# Altium PCB activity_tracker_panel_support.PcbDoc
Units mm, origin at the board's own origin, x right, y up, seen from the top; angles counter-clockwise.
Board outline 148.5 x 148.5 mm, 4 copper layers (Top Layer, MidLayer1, Mid-Layer 2, Bottom Layer), stack 0.79 mm thick; 2 components, 29 nets, 2 pads, 0 vias.
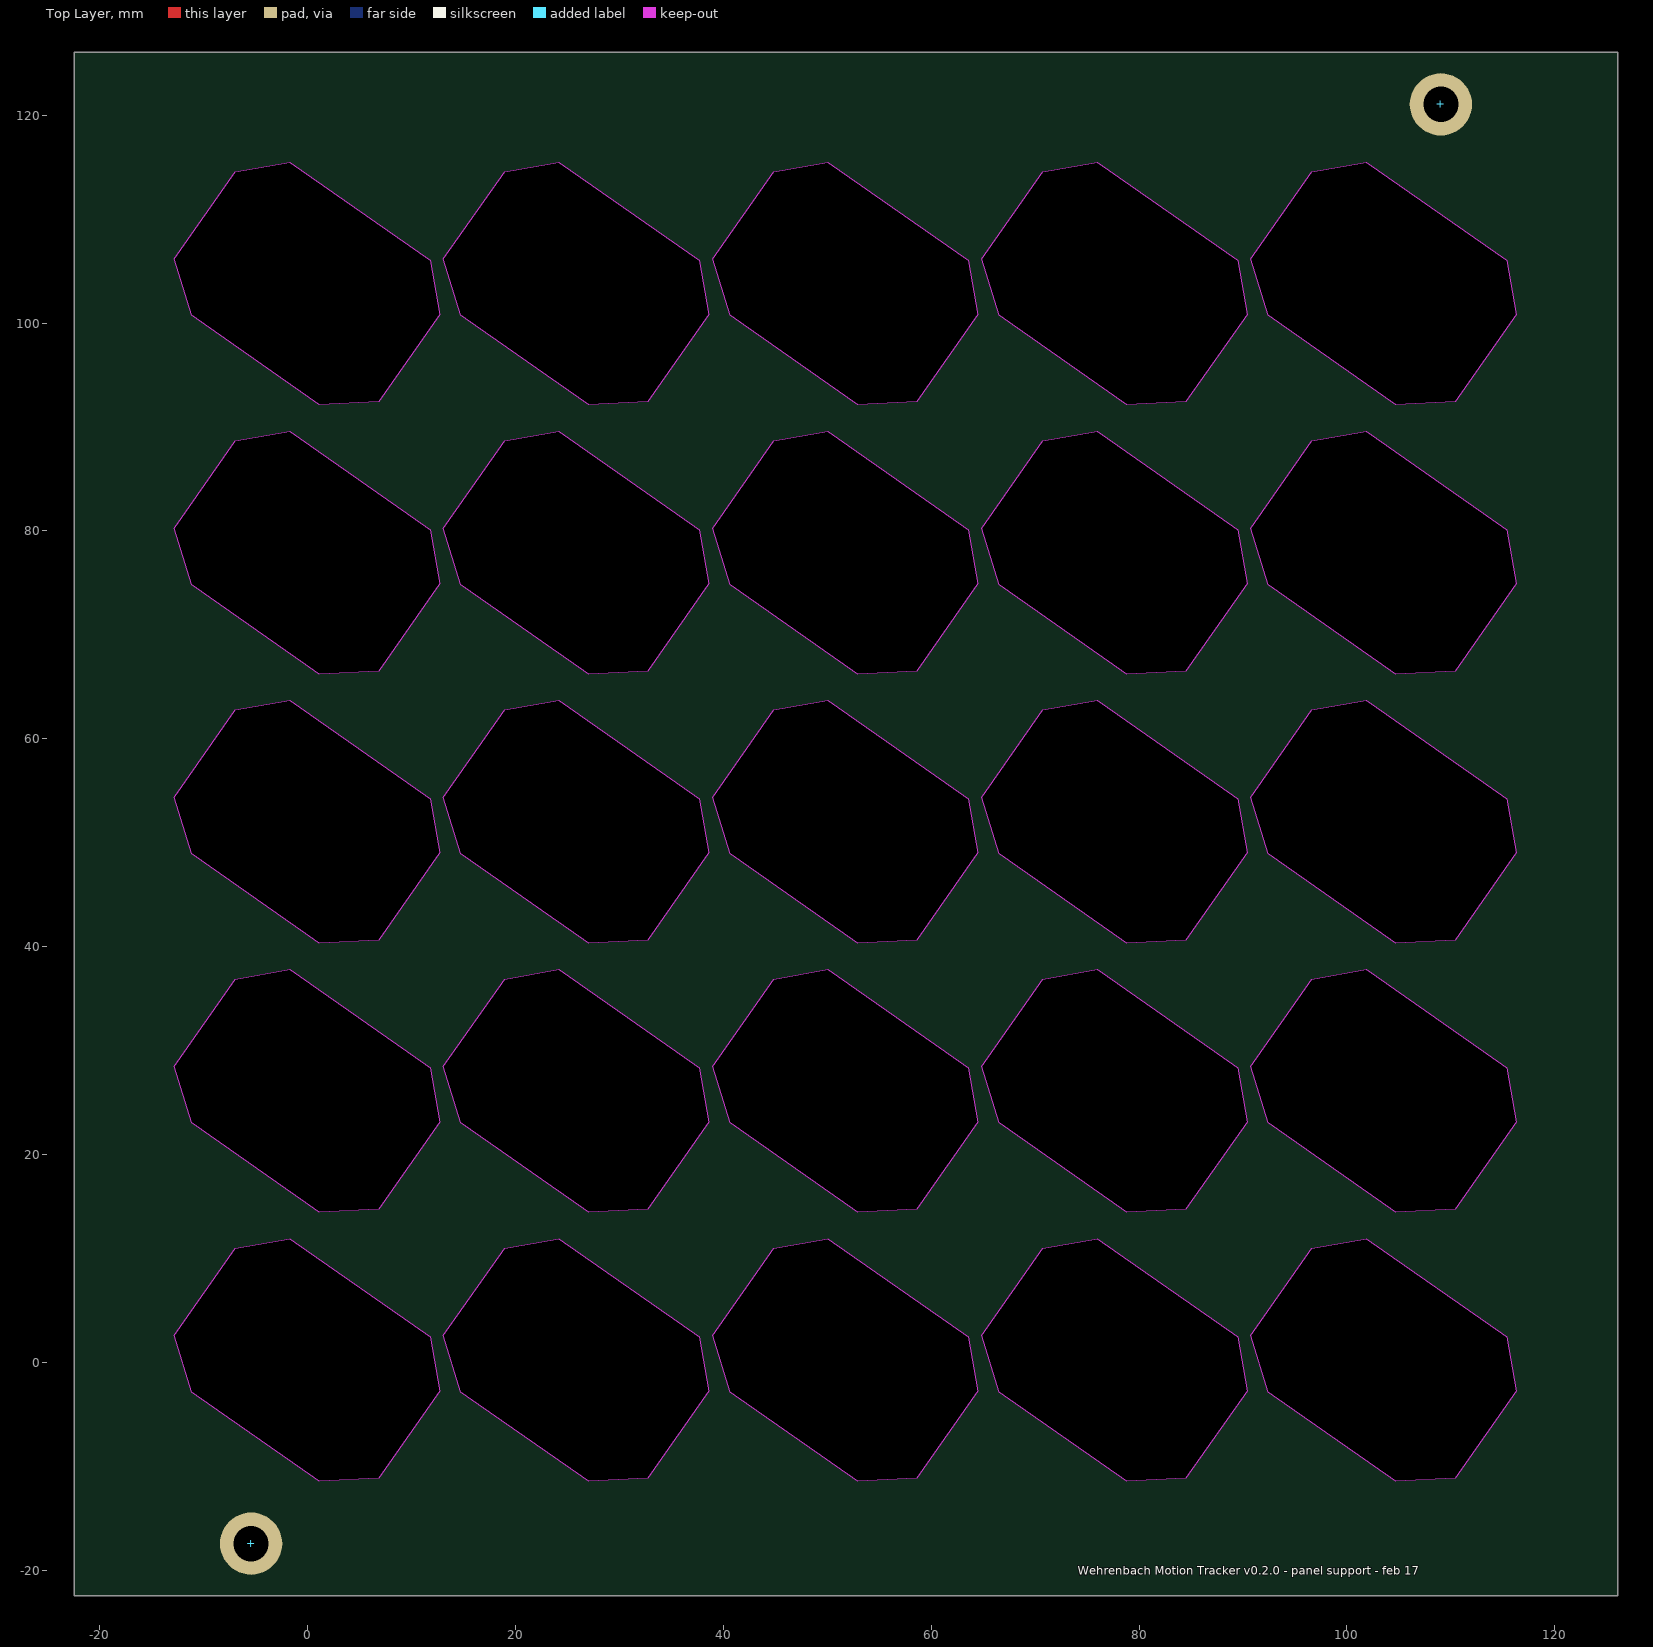
[diagram p0: Top Layer view]
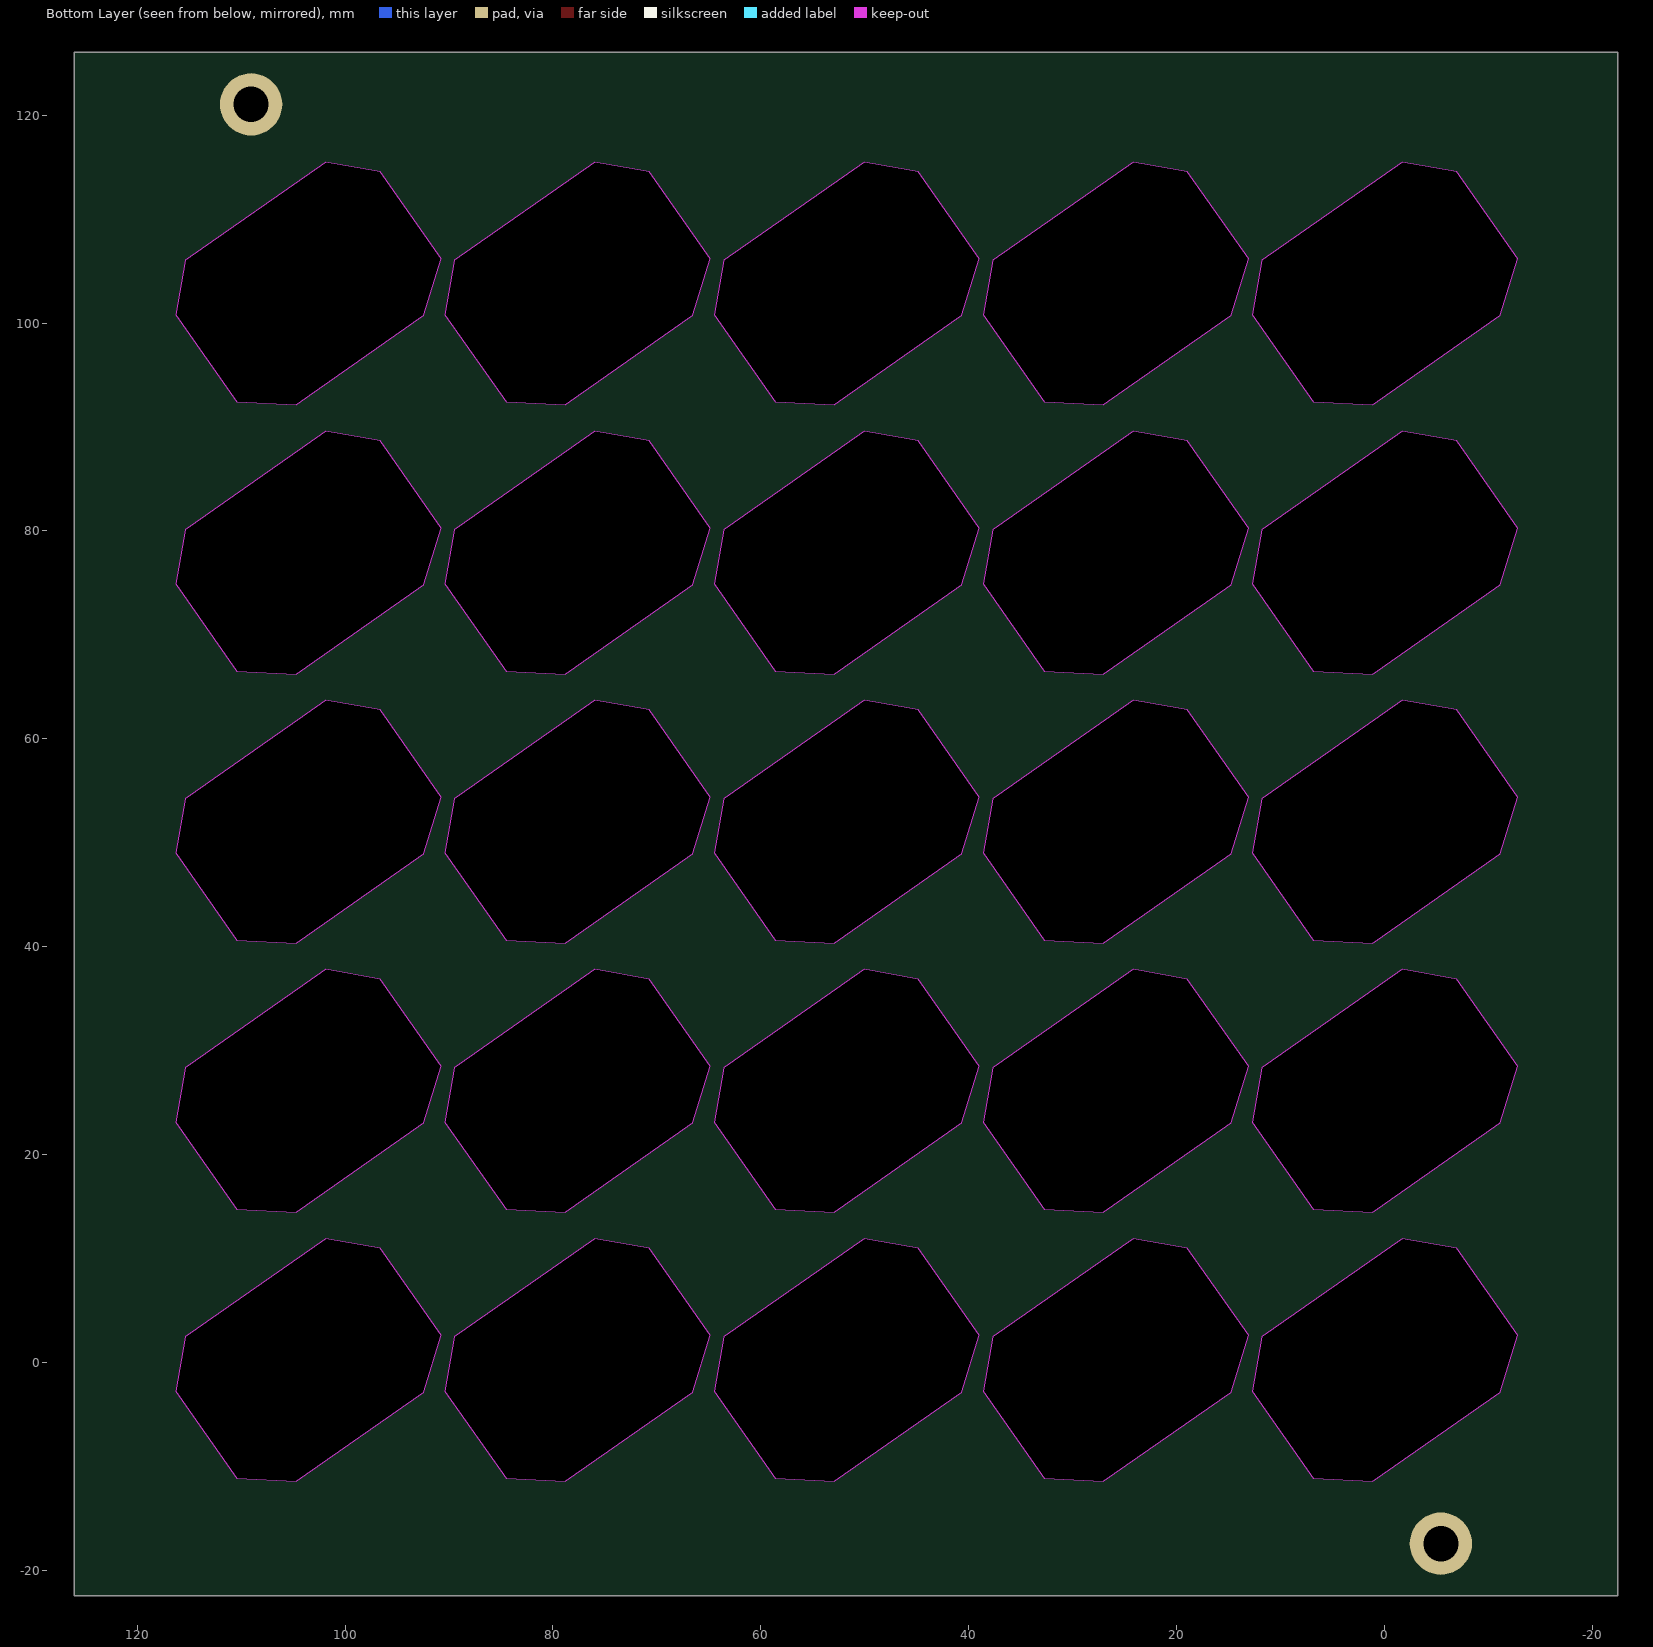
[diagram p1: Bottom Layer view, seen from below]

## Layer stack, top to bottom
Top Solder: solder mask 0.0102, Solder Resist, Dk 3.5
Top Layer: signal copper 0.0356
Dielectric1: prepreg 0.1, FR-4, Dk 4.8
MidLayer1: signal copper 0.0356
Dielectric2: prepreg 0.228, FR-4, Dk 4.8
Mid-Layer 2: signal copper 0.0356
Dielectric3: core 0.32, FR-4, Dk 4.8
Bottom Layer: signal copper 0.0356
Bottom Solder: solder mask 0.0102, Solder Resist, Dk 3.5

## Board outline
-22.45,-22.45 -22.45,126.05 126.05,126.05 126.05,-22.45
cut-out: -6.962,10.979 -1.739,11.9 11.777,2.436 12.698,-2.787 6.819,-11.183 1.125,-11.469 -11.162,-2.866 -12.841,2.582
cut-out: 18.938,10.979 24.161,11.9 37.677,2.436 38.598,-2.787 32.719,-11.183 27.025,-11.469 14.738,-2.866 13.059,2.582
cut-out: 44.838,10.979 50.061,11.9 63.577,2.436 64.498,-2.787 58.619,-11.183 52.925,-11.469 40.638,-2.866 38.959,2.582
cut-out: 70.738,10.979 75.961,11.9 89.477,2.436 90.398,-2.787 84.519,-11.183 78.825,-11.469 66.538,-2.866 64.859,2.582
cut-out: 96.638,10.979 101.861,11.9 115.377,2.436 116.298,-2.787 110.419,-11.183 104.725,-11.469 92.438,-2.866 90.759,2.582
cut-out: 96.638,36.879 101.861,37.8 115.377,28.336 116.298,23.113 110.419,14.717 104.725,14.431 92.438,23.034 90.759,28.482
cut-out: 70.738,36.879 75.961,37.8 89.477,28.336 90.398,23.113 84.519,14.717 78.825,14.431 66.538,23.034 64.859,28.482
cut-out: 44.838,36.879 50.061,37.8 63.577,28.336 64.498,23.113 58.619,14.717 52.925,14.431 40.638,23.034 38.959,28.482
cut-out: 18.938,36.879 24.161,37.8 37.677,28.336 38.598,23.113 32.719,14.717 27.025,14.431 14.738,23.034 13.059,28.482
cut-out: -6.962,36.879 -1.739,37.8 11.777,28.336 12.698,23.113 6.819,14.717 1.125,14.431 -11.162,23.034 -12.841,28.482
cut-out: 96.638,62.779 101.861,63.7 115.377,54.236 116.298,49.013 110.419,40.617 104.725,40.331 92.438,48.934 90.759,54.382
cut-out: 70.738,62.779 75.961,63.7 89.477,54.236 90.398,49.013 84.519,40.617 78.825,40.331 66.538,48.934 64.859,54.382
cut-out: 44.838,62.779 50.061,63.7 63.577,54.236 64.498,49.013 58.619,40.617 52.925,40.331 40.638,48.934 38.959,54.382
cut-out: 18.938,62.779 24.161,63.7 37.677,54.236 38.598,49.013 32.719,40.617 27.025,40.331 14.738,48.934 13.059,54.382
cut-out: -6.962,62.779 -1.739,63.7 11.777,54.236 12.698,49.013 6.819,40.617 1.125,40.331 -11.162,48.934 -12.841,54.382
cut-out: 96.638,88.679 101.861,89.6 115.377,80.136 116.298,74.913 110.419,66.517 104.725,66.231 92.438,74.834 90.759,80.282
cut-out: 70.738,88.679 75.961,89.6 89.477,80.136 90.398,74.913 84.519,66.517 78.825,66.231 66.538,74.834 64.859,80.282
cut-out: 44.838,88.679 50.061,89.6 63.577,80.136 64.498,74.913 58.619,66.517 52.925,66.231 40.638,74.834 38.959,80.282
cut-out: 18.938,88.679 24.161,89.6 37.677,80.136 38.598,74.913 32.719,66.517 27.025,66.231 14.738,74.834 13.059,80.282
cut-out: -6.962,88.679 -1.739,89.6 11.777,80.136 12.698,74.913 6.819,66.517 1.125,66.231 -11.162,74.834 -12.841,80.282
cut-out: 96.638,114.579 101.861,115.5 115.377,106.036 116.298,100.813 110.419,92.417 104.725,92.131 92.438,100.734 90.759,106.182
cut-out: 70.738,114.579 75.961,115.5 89.477,106.036 90.398,100.813 84.519,92.417 78.825,92.131 66.538,100.734 64.859,106.182
cut-out: 44.838,114.579 50.061,115.5 63.577,106.036 64.498,100.813 58.619,92.417 52.925,92.131 40.638,100.734 38.959,106.182
cut-out: 18.938,114.579 24.161,115.5 37.677,106.036 38.598,100.813 32.719,92.417 27.025,92.131 14.738,100.734 13.059,106.182
cut-out: -6.962,114.579 -1.739,115.5 11.777,106.036 12.698,100.813 6.819,92.417 1.125,92.131 -11.162,100.734 -12.841,106.182

## Design rules (kind name [scope] priority, off if disabled: settings)
AcuteAngle [All] p1: minimum=4.00000000000000E+0001 checktracksonly=FALSE
Clearance ClearanceLogoStyle1 [All vs InComponentClass('logoStyle1')] p1: gap=0.3 ignorepadtopadclearanceinfootprint=FALSE except(0: Arc-Hole Track-Hole SMDPad-Hole THPad-Hole Via-Hole Fill-Hole Poly-Hole Region-Hole Text-Hole)
Clearance ClearanceKeepout [All vs IsKeepOut] p2: gap=0.001 ignorepadtopadclearanceinfootprint=FALSE except(0: Arc-Hole Track-Hole SMDPad-Hole THPad-Hole Via-Hole Fill-Hole Poly-Hole Region-Hole Text-Hole)
Clearance ClearanceThickWire [IsTrack And AsMM(Width) > 0.2] p3: gap=0.2 ignorepadtopadclearanceinfootprint=FALSE except(0: Arc-Hole Track-Hole SMDPad-Hole THPad-Hole Via-Hole Fill-Hole Poly-Hole Region-Hole Text-Hole)
Clearance ClearancePad [IsPad vs IsPad] p4: gap=0.15 ignorepadtopadclearanceinfootprint=FALSE except(0: Arc-Hole Track-Hole SMDPad-Hole THPad-Hole Via-Hole Fill-Hole Poly-Hole Region-Hole Text-Hole)
Clearance ClearancePolyPad [InPolygon vs IsPad] p5: gap=0.3 ignorepadtopadclearanceinfootprint=FALSE except(0: Arc-Hole Track-Hole SMDPad-Hole THPad-Hole Via-Hole Fill-Hole Poly-Hole Region-Hole Text-Hole)
Clearance ClearancePoly [InPolygon vs InPolygon] p6: gap=0.25 ignorepadtopadclearanceinfootprint=FALSE except(0: Arc-Hole Track-Hole SMDPad-Hole THPad-Hole Via-Hole Fill-Hole Poly-Hole Region-Hole Text-Hole)
Clearance [All] p7: gap=0.15 ignorepadtopadclearanceinfootprint=FALSE except(0: Arc-Hole Track-Hole SMDPad-Hole THPad-Hole Via-Hole Fill-Hole Poly-Hole Region-Hole Text-Hole)
ComponentClearance [All] p1: gap=0.1 collisioncheckmode=3 verticalgap=0.1 showdistances=TRUE
ComponentOrientations [All] p1: allowedrotations=32
Height [All] p1: minheight=0 maxheight=30 prefheight=1
HoleSize [All] p1: absolutevalues=TRUE maxlimit=15 minlimit=0.3 maxpercent=80.000 minpercent=20.000
HoleToHoleClearance [All] p1: gap=0.2 allowstackedmicrovias=TRUE
MinimumAnnularRing [All] p1: minimumring=0.15
MinimumSolderMaskSliver MinimumSolderMaskSliverLogo [All vs ( InComponentClass('ignoreSilkscreen') or InComponentClass('leitwertLogo'))] p1: minsoldermaskwidth=0
MinimumSolderMaskSliver [All] p2: minsoldermaskwidth=0.1
PasteMaskExpansion [All] p1: expansion=-0.075
PermittedLayers [All] p1: toplayerpermitted=TRUE bottomlayerpermitted=FALSE
PlaneClearance [All] p1: clearance=0.5
PlaneConnect [All] p1: planeconnectstyle=Relief reliefexpansion=0.5 reliefentries=4 reliefconductorwidth=0.25 reliefairgap=0.25
PolygonConnect PolygonConnectComponents [All vs InComponentClass('directConnect')] p1: connectstyle=Direct reliefconductorwidth=0.254 reliefentries=4 polygonreliefangle="90 Angle" airgapwidth=0.254
PolygonConnect PolygonConnectVia [IsVia] p2: connectstyle=Direct reliefconductorwidth=0.254 reliefentries=4 polygonreliefangle="90 Angle" airgapwidth=0.254
PolygonConnect PolygonConnectPoly [InPolygonClass('directConnect')] p3: connectstyle=Direct reliefconductorwidth=0.254 reliefentries=4 polygonreliefangle="90 Angle" airgapwidth=0.254
PolygonConnect [All] p4: connectstyle=Relief reliefconductorwidth=0.25 reliefentries=4 polygonreliefangle="90 Angle" airgapwidth=0.254
RoutingCorners [All] p1: cornerstyle=45-Degree minsetback=2.5 maxsetback=2.5
RoutingVias [All] p1: holewidth=0.3 width=0.6 viastyle="Through Hole" minholewidth=0.3 minwidth=0.5 maxholewidth=1.5 maxwidth=2
SilkToSilkClearance [All] p1: silktosilkclearance=0.1
SilkToSolderMaskClearance SilkscreenOverComponentPadsLogo [IsPad vs ( InComponentClass('ignoreSilkscreen') or InComponentClass('logoStyle1'))] p1: minsilkscreentomaskgap=0 clearancetoexposedcopper=TRUE
SilkToSolderMaskClearance SilkscreenOverComponentPads [IsPad vs not InComponentClass('ignoreSilkscreen')] p2: minsilkscreentomaskgap=0.001 clearancetoexposedcopper=TRUE
SolderMaskExpansion SolderMaskExpansionVia [IsVia] p1: expansion=-0.635
SolderMaskExpansion [All] p2: expansion=0.038
Width WidthLogoStyle1 [InComponentClass('logoStyle1')] p1: maxlimit=100 minlimit=0.15 preferedwidth=0.25 checkconnectedcopper=TRUE
Width [All] p2: maxlimit=10 minlimit=0.2 preferedwidth=0.2
19 further rules are at their usual default settings.

## Components (designator, comment, footprint, x,y, rotation, side; value= is the part's Value field where it differs from the comment)
+ "Comment" M3_PLATED_MEDIUM -5.45,-17.45 r270 top
+ "Comment" M3_PLATED_MEDIUM 109.05,121.05 r270 top

## Footprints (in the part's own frame and the unit in brackets; to place one, negate y for a bottom-side part, rotate by r counter-clockwise, add the part's x,y. Pads: shape width x height; smd on the part's side, far side on the other; paste and mask are expansions set on the pad)
M3_PLATED_MEDIUM [mm] "Plated M3 Hole Medium Size"
  round 6 hole 3.4 paste-3: H(0,0)

## Nets (pads, with @x,y where several pads share a name; then routed paths per layer and width w, separated by ;. In a path a pad name is that pad's centre, name@x,y a point inside that pad or via, vN(x,y) a via of type N, cw(c..) or ccw(c..) an arc to the next point about the centre after c; other vN are vias at no path point)
ACC_ADC: 
ACC_C\S\: 
ACC_INT1: 
ACC_INT2: 
ACC_MISO: 
ACC_MOSI: 
ACC_SCK: 
FL_C\S\: 
FL_E\N\: 
FL_F\S\H\D\N\: 
FL_MISO: 
FL_MOSI: 
FL_SCK: 
GND: 
INT_BUT: 
LED1: 
LED2: 
NetC2_2: 
NetC11_1: 
NetLED1_1: 
NetLED2_1: 
RESET: 
SWDCLK: 
SWDIO: 
SWO: 
V_FL+: 
VBAT+: 
XL1: 
XL2: 
pads on no net: +.H

## Silkscreen, mask and mechanical layers (free items; w line width, h text height)
Top Overlay:
  text "Wehrenbach Motion Tracker v0.2.0 - panel support - feb 17" at 74.1,-20.45 h0.8
Outline:
  drawing of 204 lines, arcs and shapes, not listed